# Altium PCB PCB1.PcbDoc
Units mm, origin at the board's own origin, x right, y up, seen from the top; angles counter-clockwise.
Board outline 51.5 x 50 mm, 4 copper layers (Top Layer, L2 (GND), L3 GND), L4 Signal), stack 1.97 mm thick; 35 components, 29 nets, 164 pads, 70 vias.
Unrouted connection lines stored in the file: 10.
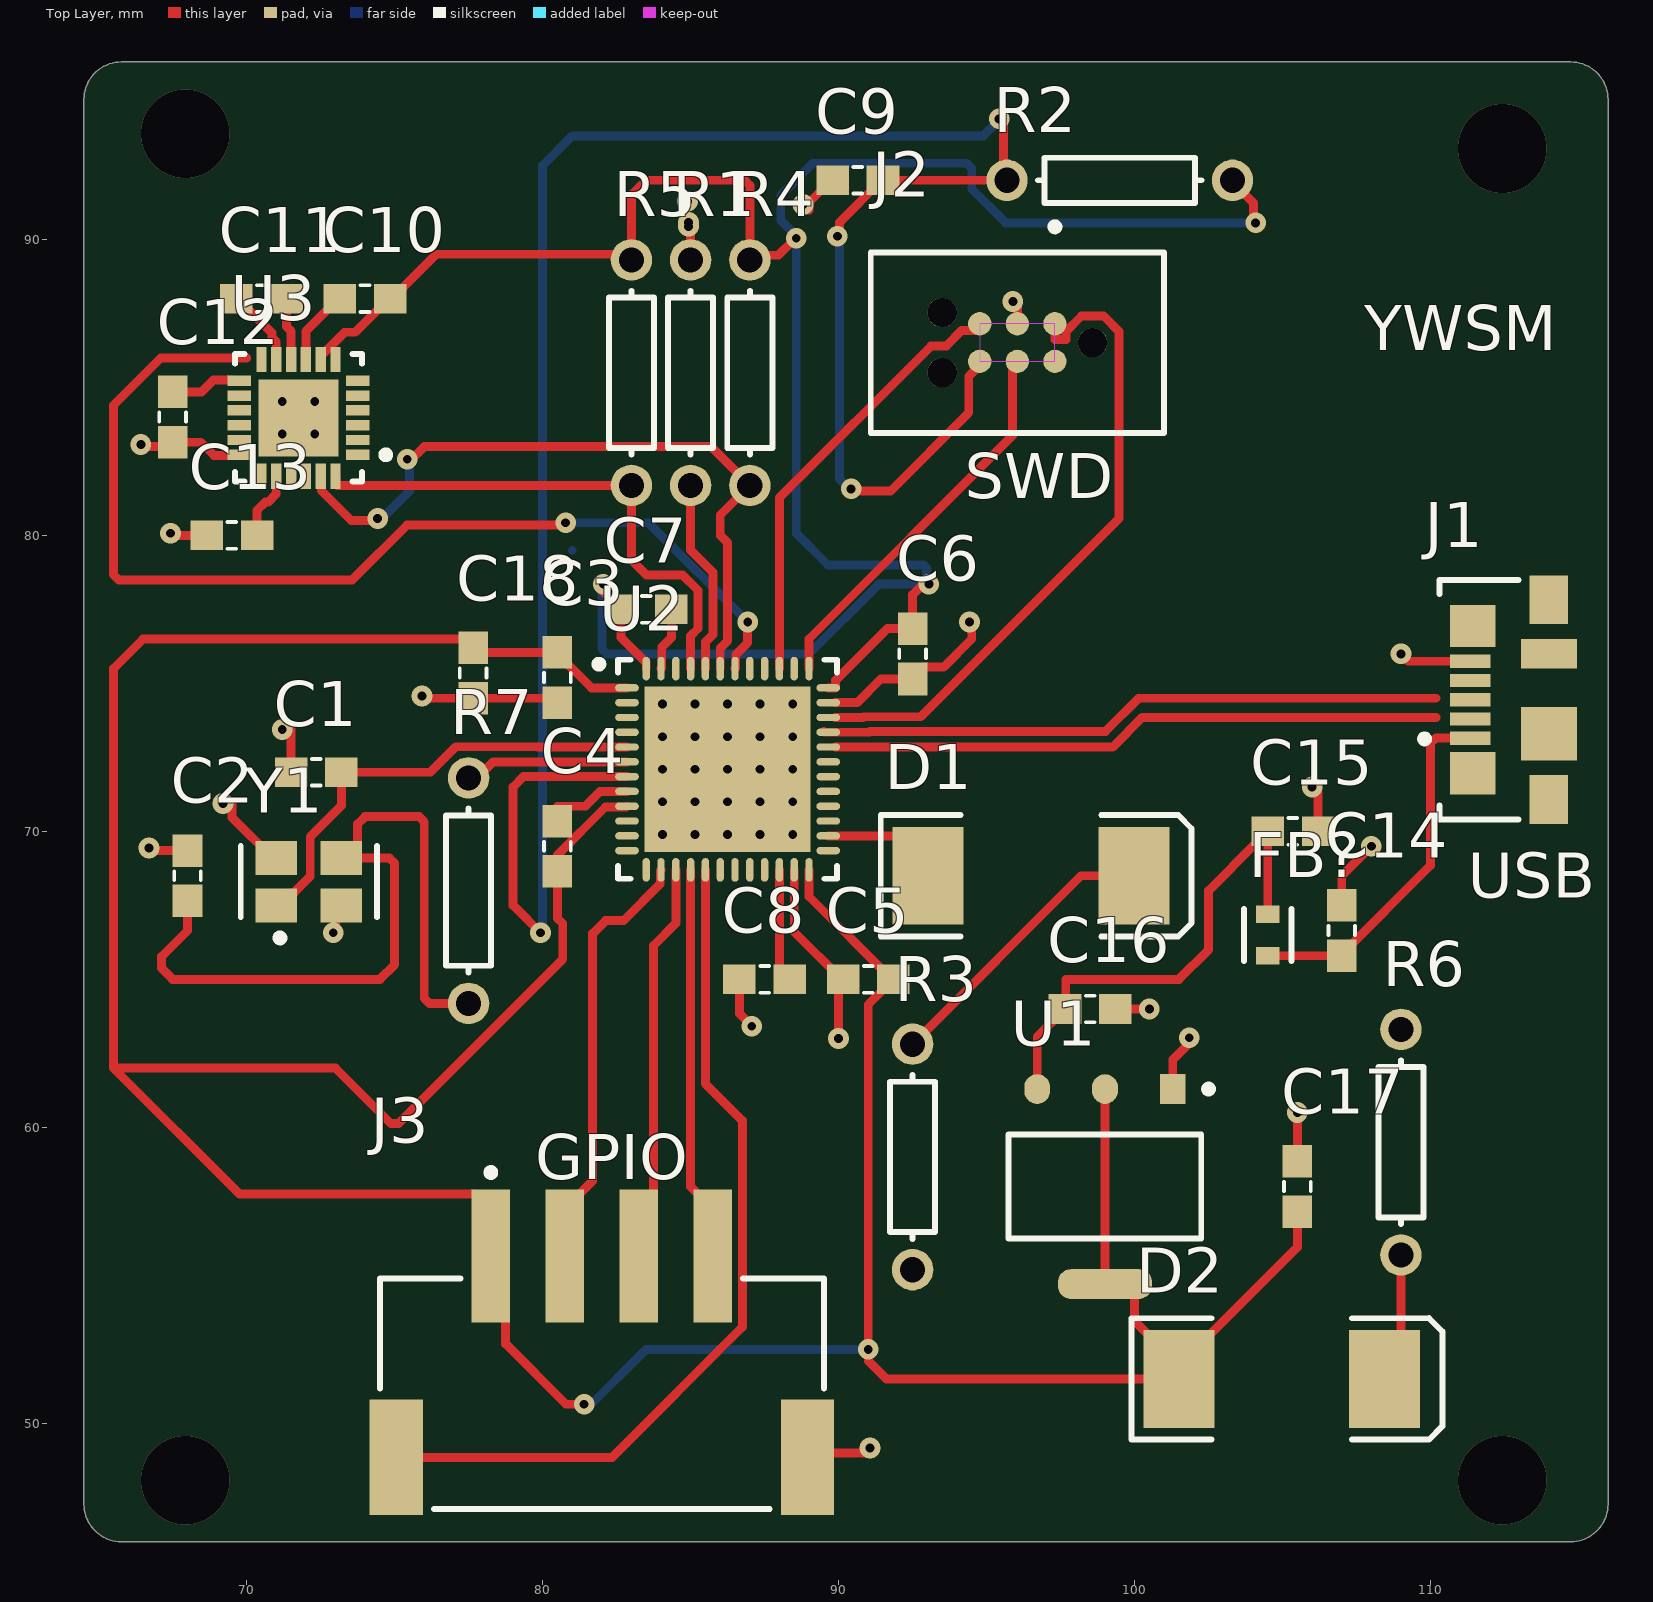
[diagram p0: Top Layer view]
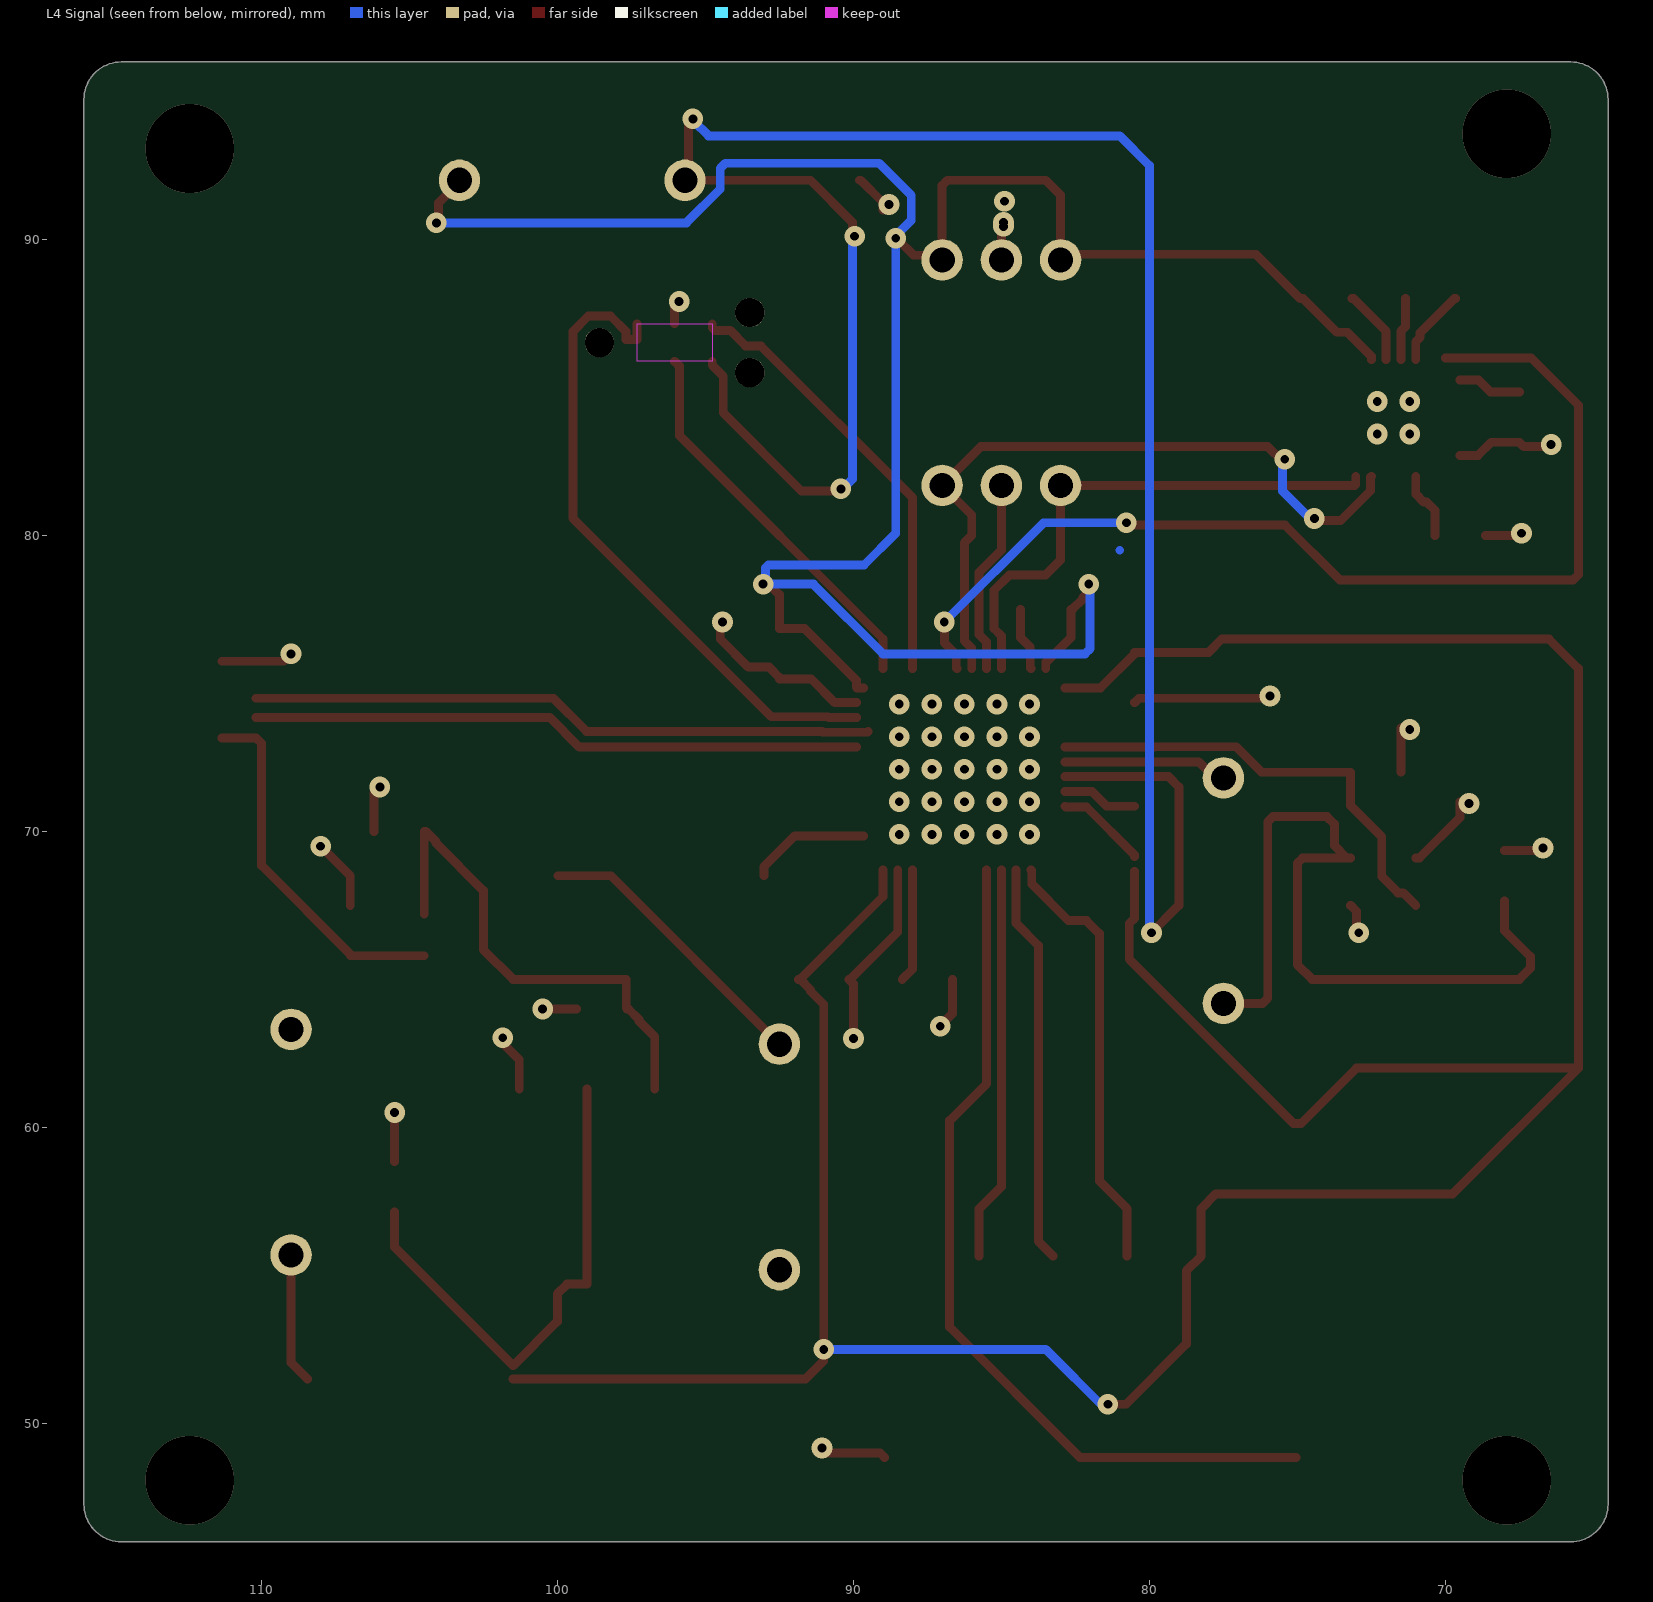
[diagram p1: L4 Signal view, seen from below]
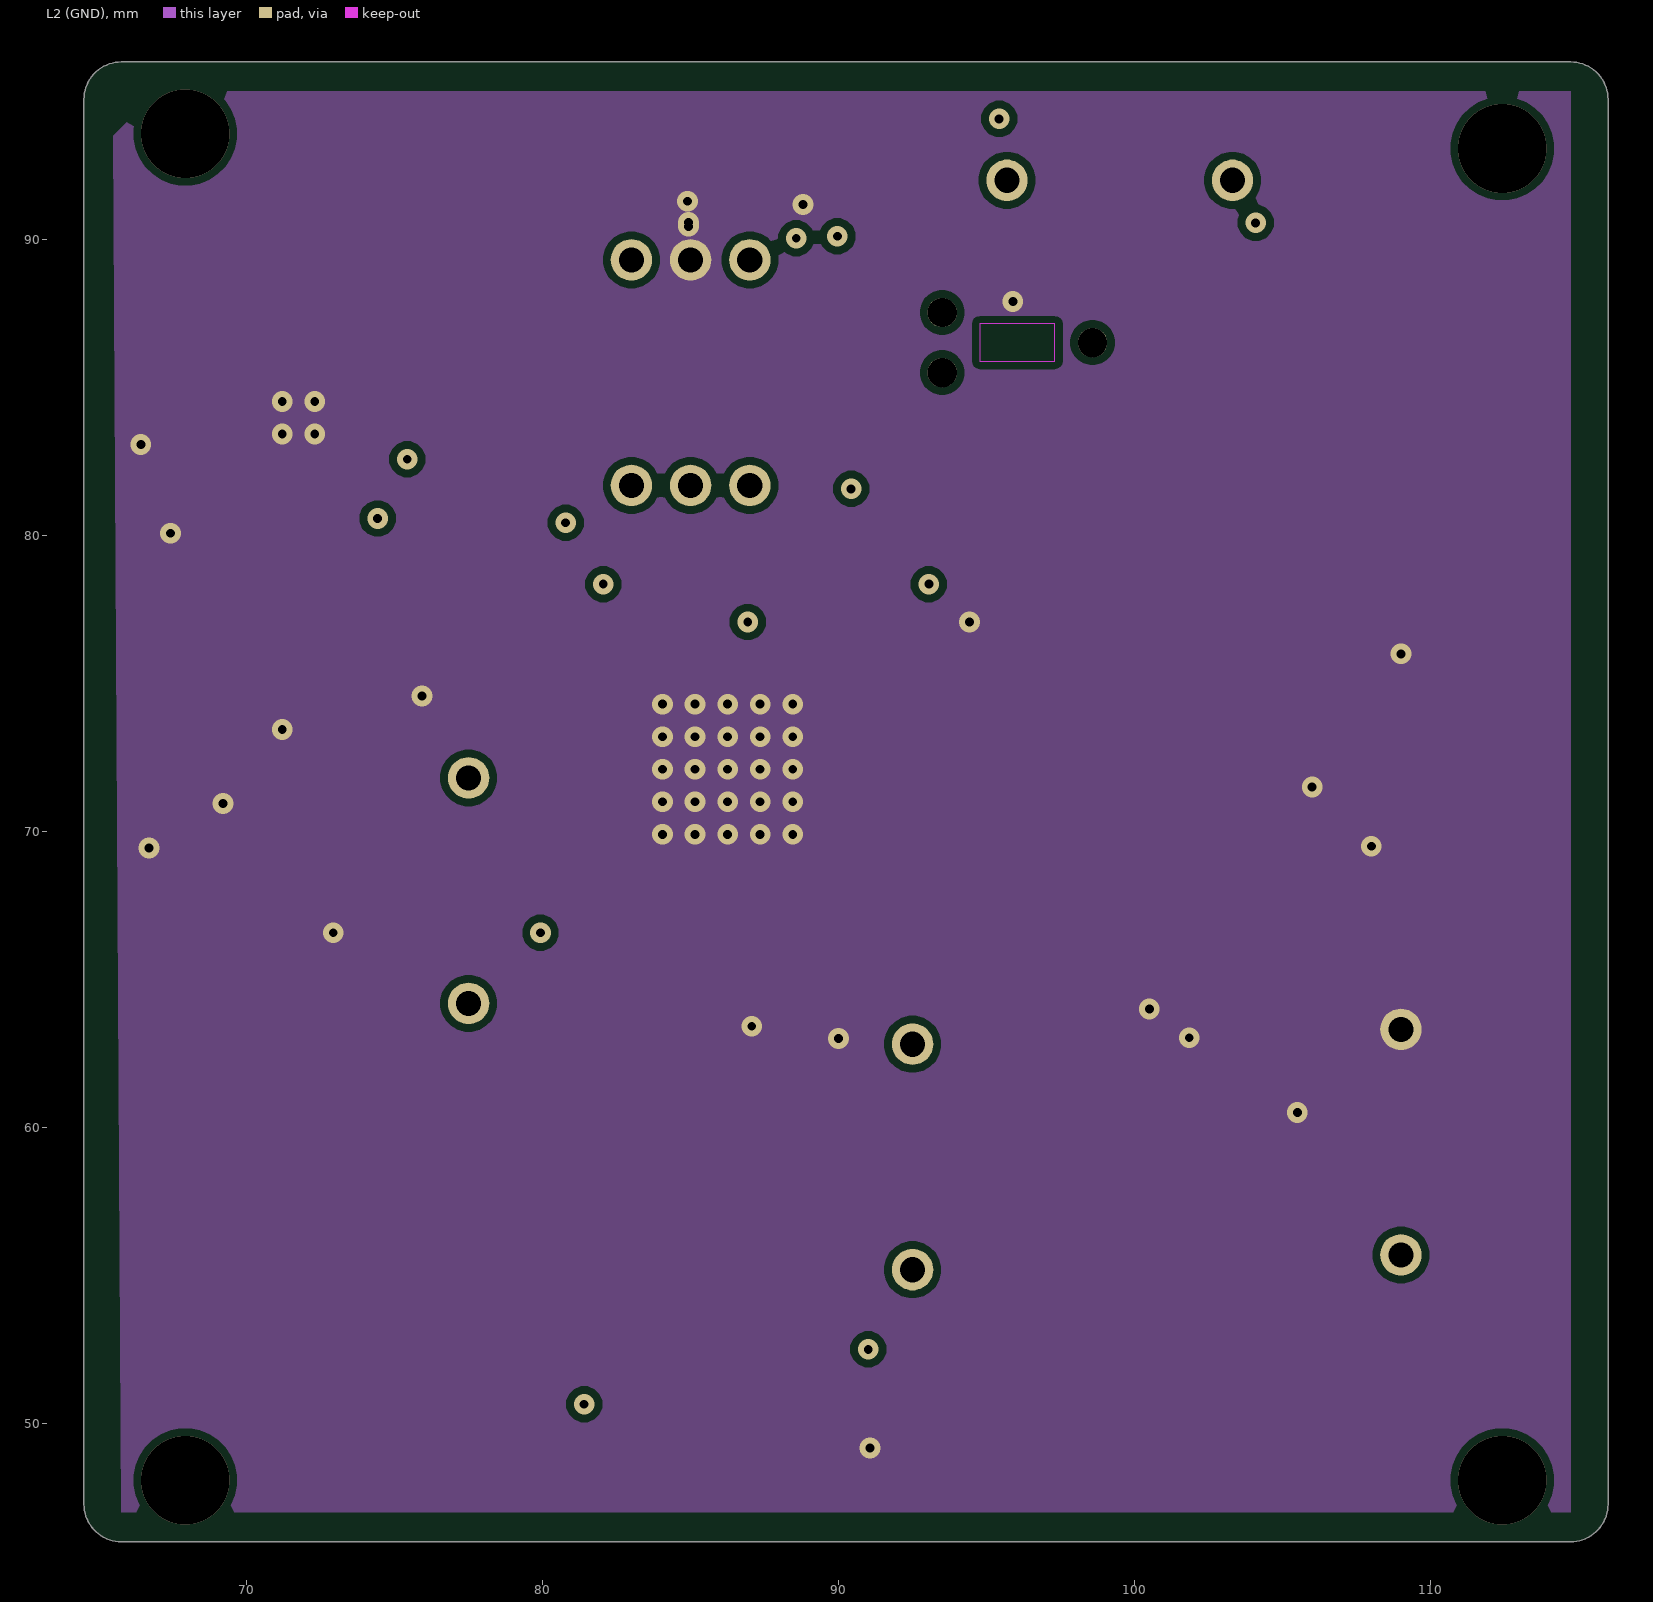
[diagram p2: L2 (GND)]
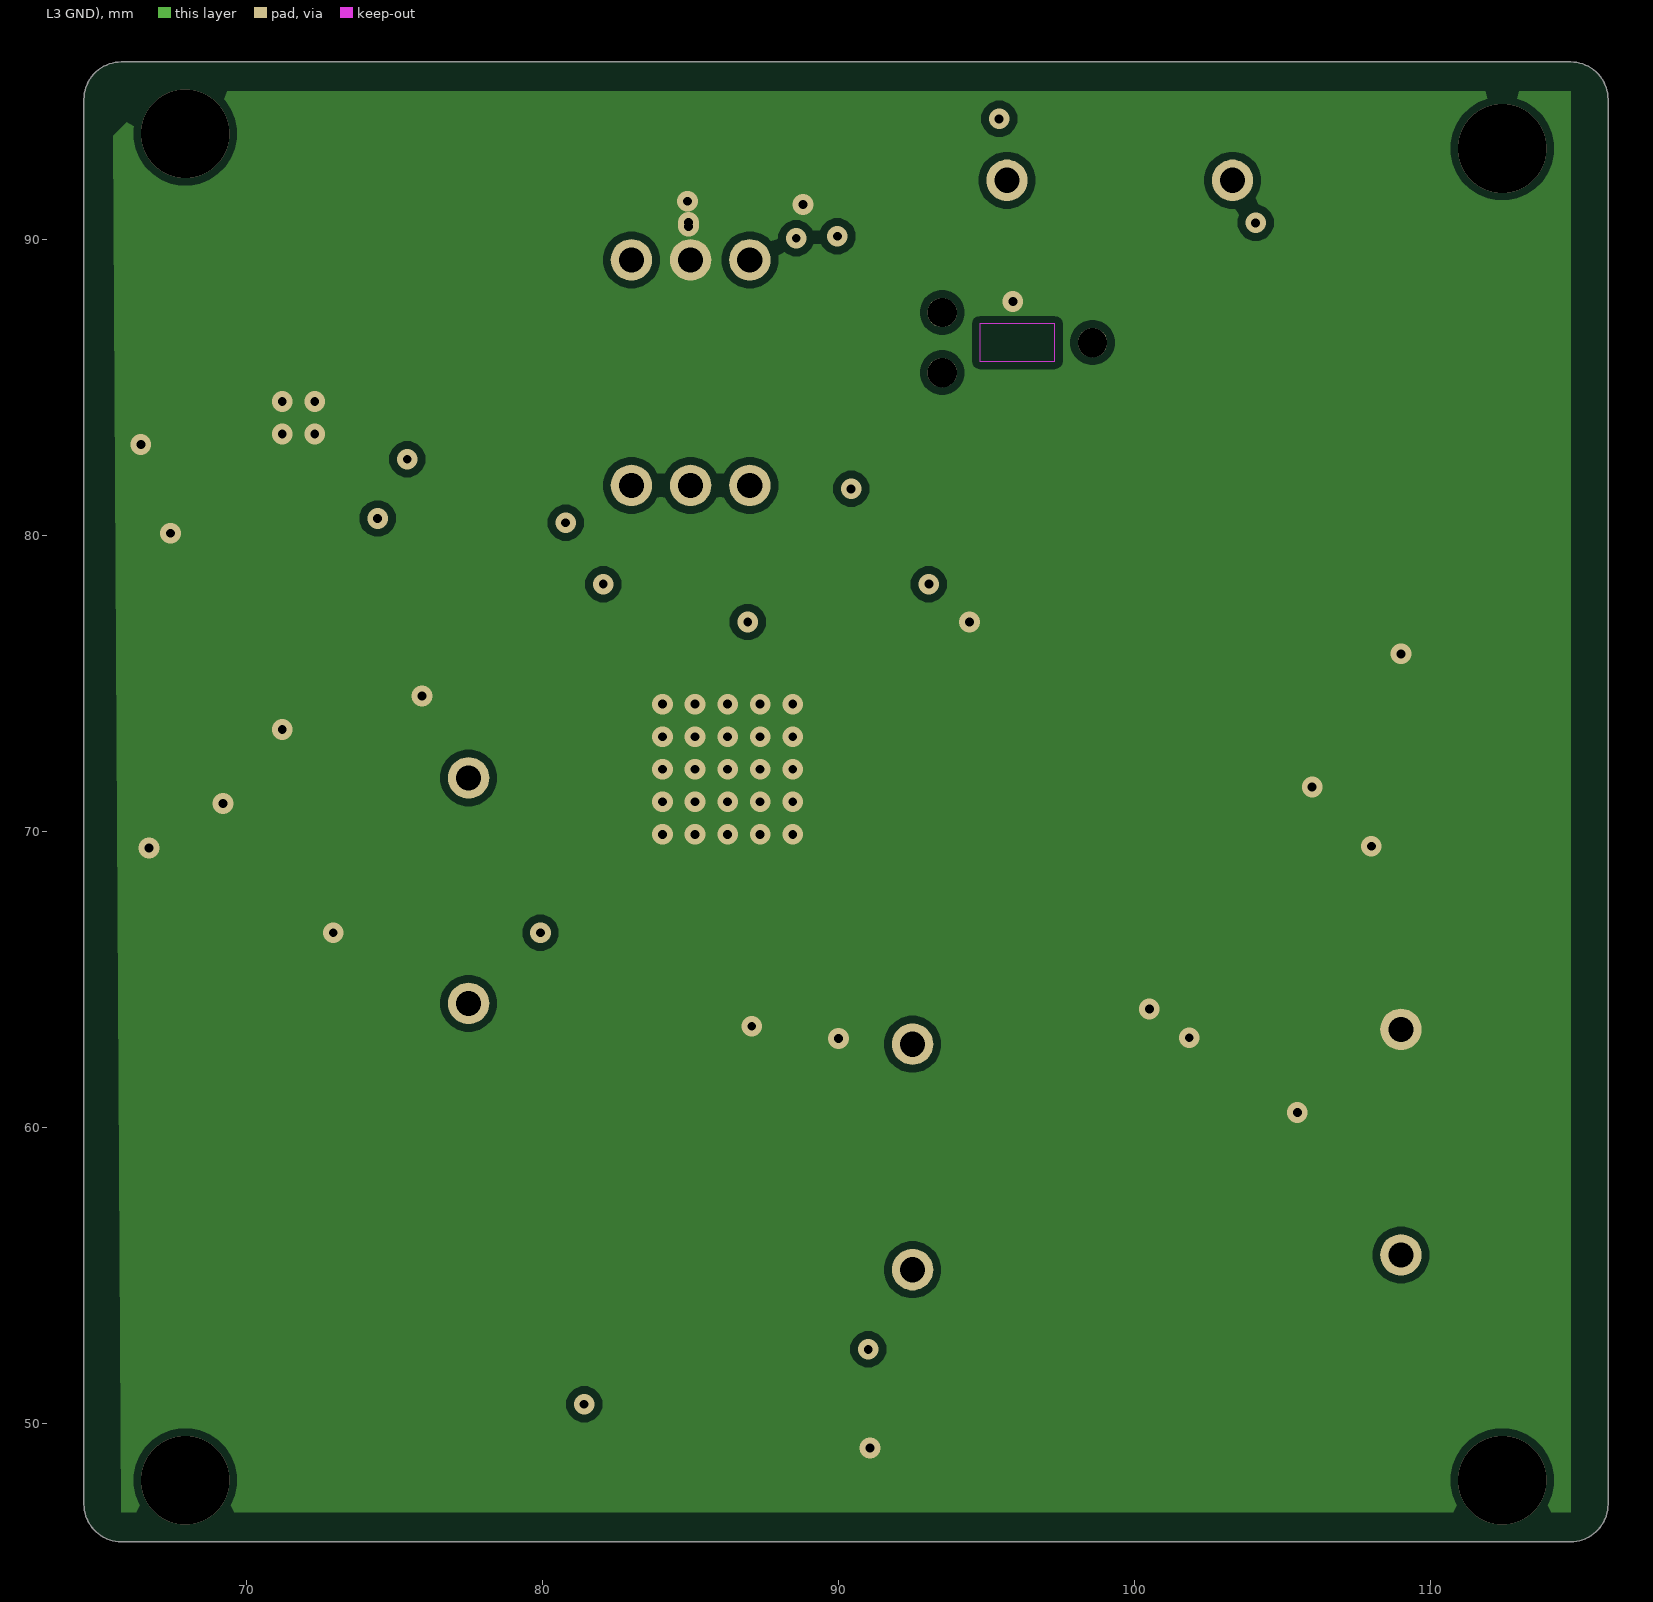
[diagram p3: L3 GND)]
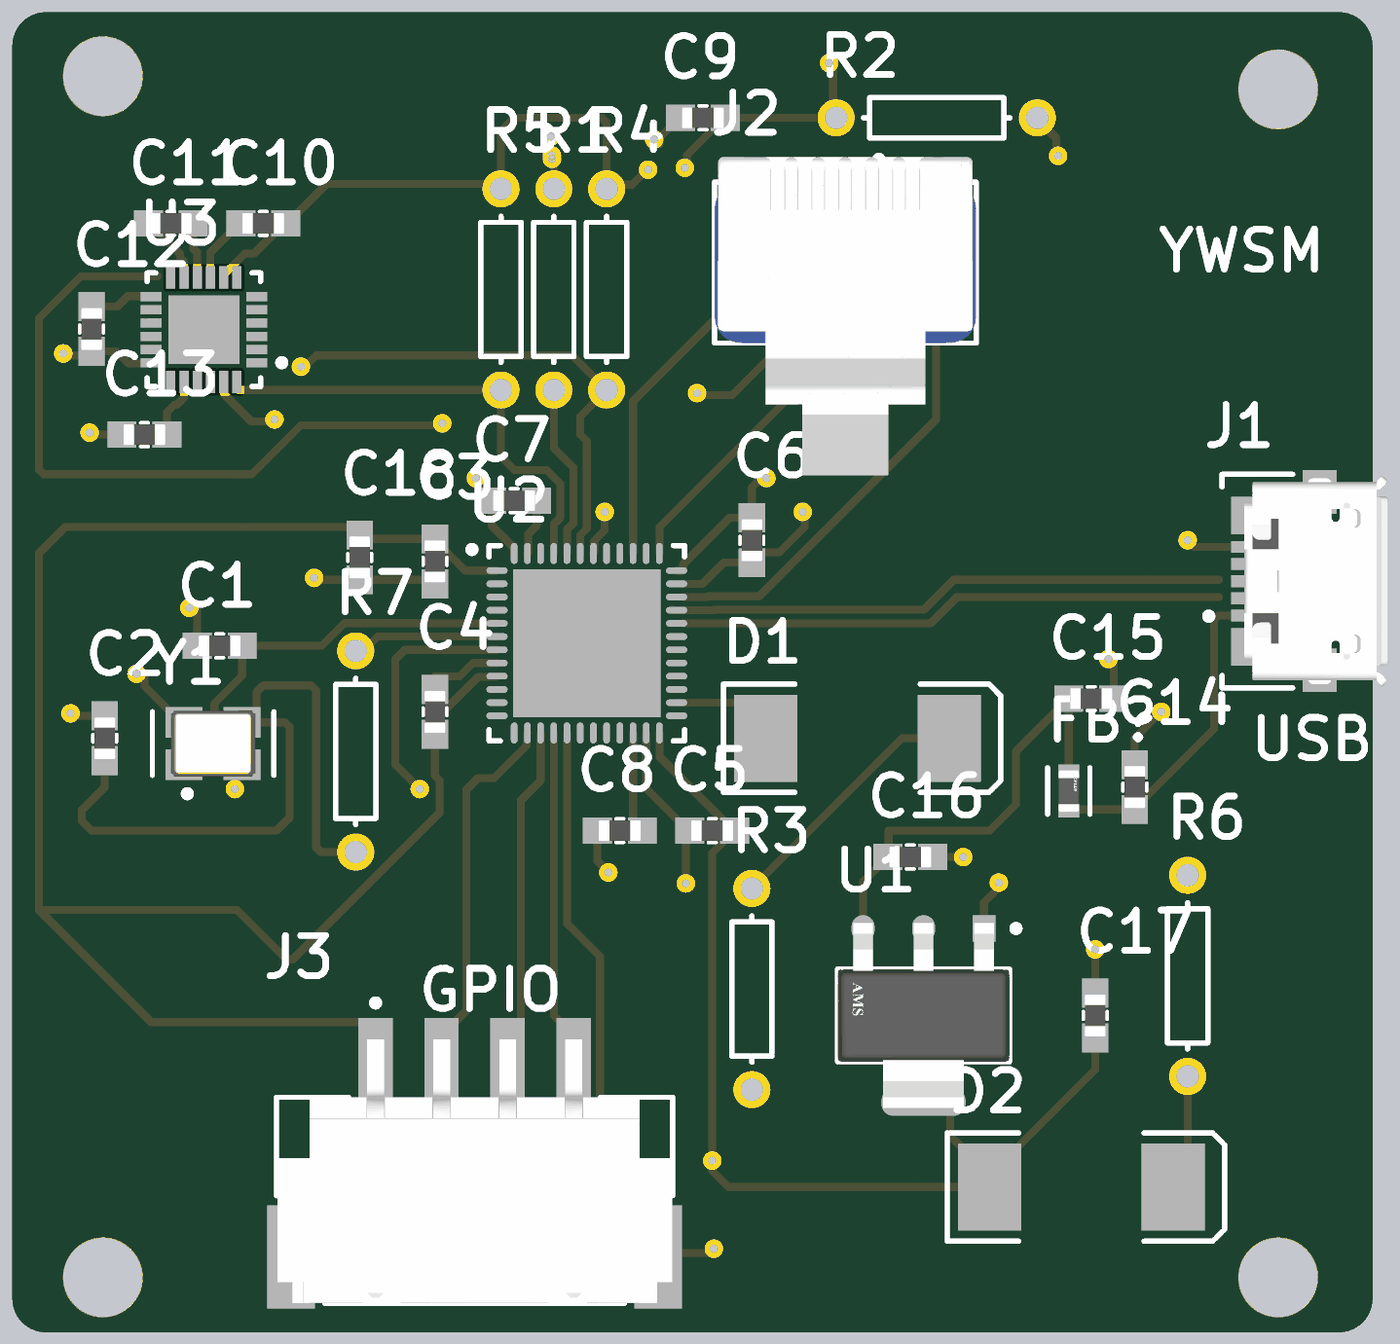
[diagram p4: 3D render of the assembled board from above, using the file's embedded part models]

## Layer stack, top to bottom
Top Solder: solder mask 0.0254, SM-001, Dk 4
Top Layer: signal copper 0.035
Dielectric 1: prepreg 0.2, PP-017, Dk 4.6
Dielectric 2: prepreg 0.2, PP-017, Dk 4.6
L2 (GND): signal copper 0.0175
Dielectric 3: core 1.065, Core-039, Dk 4.6
L3 GND): signal copper 0.0175
Dielectric 4: prepreg 0.2, PP-017, Dk 4.6
Dielectric 5: prepreg 0.2, PP-017, Dk 4.6
L4 Signal: signal copper 0.035
Bottom Solder: solder mask 0.0254, SM-001, Dk 4

## Board outline
64.5,47.27 ccw(c65.77,47.27) 65.77,46 114.73,46 ccw(c114.73,47.27) 116,47.27 116,94.73 ccw(c114.73,94.73) 114.73,96 65.77,96 ccw(c65.77,94.73) 64.5,94.73

## Design rules (kind name [scope] priority, off if disabled: settings)
Clearance [All] p1: gap=0.254 ignorepadtopadclearanceinfootprint=FALSE except(0.2: Arc-Arc Arc-Track Arc-SMDPad Arc-THPad Track-Track Track-SMDPad Track-THPad)
DiffPairsRouting [All] p1: maxlimit=0.203 minlimit=0.127 mostfreqgap=0.203 toplayer_mingap=0.203 toplayer_minwidth=0.416 toplayer_maxwidth=0.416 toplayer_prefwidth=0.416 midlayer1_maxgap=0.127 midlayer1_prefgap=0.127 midlayer1_minwidth=0.172 midlayer1_maxwidth=0.172 midlayer1_prefwidth=0.172 midlayer2_maxgap=0.127 midlayer2_prefgap=0.127 midlayer2_minwidth=0.172 midlayer2_maxwidth=0.172 midlayer2_prefwidth=0.172 bottomlayer_mingap=0.203 bottomlayer_minwidth=0.416 bottomlayer_maxwidth=0.416 bottomlayer_prefwidth=0.416 impedanceprofiledriven=TRUE impedanceprofileid={C4286DEB-E321-4A9C-8A9B-8DC85CD1D323} impedanceprofilevalue=90.000000 maxuncoupledlength=12.7
PolygonConnect [All] p1: connectstyle=Direct reliefconductorwidth=0.254 reliefentries=4 polygonreliefangle="90 Angle" airgapwidth=0.254
RoutingVias [All] p1: holewidth=0.3 width=0.9 viastyle="Through Hole" minholewidth=0.25 minwidth=0.55 maxholewidth=0.4 maxwidth=0.7
ShortCircuit [All] p1 off: allowed=FALSE
SolderMaskExpansion [All] p1: expansion=0 istentingtop=FALSE
SupplyNets "Schematic Supply Nets_5" [InNet('VCC')] p1: voltage=0.000
SupplyNets "Schematic Supply Nets_4" [InNet('VBUS')] p2: voltage=0.000
SupplyNets "Schematic Supply Nets_3" [InNet('+3V3')] p3: voltage=0.000
SupplyNets "Schematic Supply Nets_2" [InNet('NetR3_1')] p4: voltage=0.000
SupplyNets "Schematic Supply Nets_1" [InNet('GND')] p5: voltage=0.000
SupplyNets "Schematic Supply Nets" [InNet('+5')] p6: voltage=0.000
Width [All] p1: maxlimit=1 minlimit=0.2 preferedwidth=0.3 midlayer1_minwidth=0.254 midlayer1_maxwidth=0.254 midlayer1_prefwidth=0.254 midlayer2_minwidth=0.254 midlayer2_maxwidth=0.254 midlayer2_prefwidth=0.254 minimp=50.000000 maximp=50.000000 favimp=50.000000
28 further rules are at their usual default settings.

## Components (designator, comment, footprint, x,y, rotation, side; value= is the part's Value field where it differs from the comment)
C1 "CC0603KRX7R6BB104" CAPC1608X90 72.35,72 r180 top
C2 "CC0603KRX7R6BB104" CAPC1608X90 68,68.5 r90 top
C3 "CC0603KRX7R6BB104" CAPC1608X90 80.5,75.2 r270 top
C4 "CC0603KRX7R6BB104" CAPC1608X90 80.5,69.5 r90 top
C5 "CC0603KRX7R6BB104" CAPC1608X90 91,65 r180 top
C6 "CC0603KRX7R6BB104" CAPC1608X90 92.5,76 r270 top
C7 "CC0603KRX7R6BB104" CAPC1608X90 83.5,77.5 r0 top
C8 "CC0603KRX7R6BB104" CAPC1608X90 87.5,65 r180 top
C9 "CC0603KRX7R6BB104" CAPC1608X90 90.65,92 r180 top
C10 "CC0603KRX7R6BB104" CAPC1608X90 74,88 r180 top
C11 "CC0603KRX7R6BB104" CAPC1608X90 70.5,88 r180 top
C12 "CC0603KRX7R6BB104" CAPC1608X90 67.5,84 r270 top
C13 "CC0603KRX7R6BB104" CAPC1608X90 69.5,80 r180 top
C14 "CC0603KRX7R6BB104" CAPC1608X90 107,66.65 r90 top
C15 "CC0603KRX7R6BB104" CAPC1608X90 105.35,70 r0 top
C16 "CC0603KRX7R6BB104" CAPC1608X90 98.5,64 r0 top
C17 "CC0603KRX7R6BB104" CAPC1608X90 105.5,58 r90 top
C18 "CC0603KRX7R6BB104" CAPC1608X90 77.65,75.35 r270 top
D1 "Diode" SMC 96.5,68.5 r0 top
D2 "Diode" SMC 104.975,51.5 r0 top
FB? "MPZ1608S221ATA00 | 120R" FP-MPZ1608-0_8-MFG 104.5,66.5 r90 top
J1 "473460001" FP-473460001-MFG 113.65,74.45 r90 top
J2 "TC2030-MCP-NL" FP-TC2030-MCP-NL-MFG 96.04,86.516 r180 top
J3 "(Q)S4B-XH-SM4-TB (LF)(SN)" FP-Q_S4B-XH-SM4-TB_LF-MFG 82,51 r0 top
R1 "Res1" AXIAL-0.3 85,85.5 r270 top value=1K
R2 "Res1" AXIAL-0.3 99.5,92 r0 top value=10k
R3 "Res1" AXIAL-0.3 92.5,59 r90 top value=1K
R4 "Res1" AXIAL-0.3 87,85.5 r90 top value=1K
R5 "Res1" AXIAL-0.3 83,85.5 r90 top value=1K
R6 "Res1" AXIAL-0.3 109,59.5 r270 top value=1K
R7 "Res1" AXIAL-0.3 77.5,68 r270 top value=0R
U1 "AMS1117-3.3" FP-ams1117-IPC_C 99,58 r270 top
U2 "STM32F411CEU6" STM-UFQFPN48_L 86.25,72.1 r0 top
U3 "MPU-6050" IS-QFN-24_V 71.75,83.975 r180 top
Y1 "24MHz" FP-TSX-3225-MFG 72.1,68.3 r0 top

## Footprints (in the part's own frame and the unit in brackets; to place one, negate y for a bottom-side part, rotate by r counter-clockwise, add the part's x,y. Pads: shape width x height; smd on the part's side, far side on the other; paste and mask are expansions set on the pad)
AXIAL-0.3 [mm] "Axial Device, Thru-Hole; 2 Leads; 0.3 in Pin Spacing"
  round 1.4 hole 0.85: 1(-3.81,0) 2(3.81,0)
  silkscreen extent -2.77,-0.76 2.77,0.76
CAPC1608X90 [mm]
  rect 1.1x1 smd: 1(-0.85,0) 2(0.85,0)
  silkscreen extent -0.15,-0.45 0.15,0.45, body extent -0.8,-0.4 0.8,0.4, height 0.9
FP-473460001-MFG [mm]
  rect 0.45x1.38 smd paste+0 mask+0: 1(-1.3,2.31) 2(-0.65,2.31) 3(0,2.31) 4(0.65,2.31) 5(1.3,2.31)
  rect 1.425x1.55 smd paste+0 mask+0: 6(-2.488,2.225) 7(2.488,2.225)
  rect 1.65x1.3 smd paste+0 mask+0: 8(-3.375,-0.35) 11(3.375,-0.35)
  rect 1.8x1.9 smd paste+0 mask+0: 9(-1.15,-0.35)
  rect 1x1.9 smd paste+0 mask+0: 10(1.55,-0.35)
  silkscreen extent -4.05,0.67 4.05,3.97, body extent -4.3,-2.48 4.3,3.45, height 0.25
FP-ams1117-IPC_C [mm]
  rect 1.004x0.872 smd paste+0 mask+0: 1(-3.295,2.29)
  rrect100% 1.004x0.872 smd paste+0 mask+0: 2(-3.295,0) 3(-3.295,-2.29)
  rrect87% 1.004x3.182 smd paste+0 mask+0: 4(3.295,0)
  silkscreen extent -3.42,-3.25 1.75,3.63, body extent -3.9,-3.35 3.9,3.35, height 0.25
FP-MPZ1608-0_8-MFG [mm]
  rect 0.6x0.8 smd paste+0 mask+0: 1(-0.7,0) 2(0.7,0)
  silkscreen extent -0.87,-0.8 0.87,0.8, body extent -1.1,-0.58 1.1,0.58, height 0.25
FP-Q_S4B-XH-SM4-TB_LF-MFG [mm]
  rect 1.3x4.5 smd paste+0 mask+0: 1(-3.75,4.65) 2(-1.25,4.65) 3(1.25,4.65) 4(3.75,4.65)
  rect 1.8x3.9 smd paste+0 mask+0: 5(-6.95,-2.15) 6(6.95,-2.15)
  silkscreen extent -7.5,-3.9 7.5,7.6, body extent -7.95,-4.2 7.95,7, height 0.25
FP-TC2030-MCP-NL-MFG [mil]
  round 30.98 smd paste-39370.1 mask+0: 1(-50,-25) 2(-50,25) 3(0,-25) 4(0,25) 5(50,-25) 6(50,25)
  round 39.02 hole 39.02 unplated paste-99999 mask+0: ""(-100,0) ""(100,-40) ""(100,40)
  Keep-Out Layer region: -50.01,-25 49.99,-25 49.99,25 -50.01,25
  silkscreen extent -195,-159 195,120, body extent -199,-124 199,124, height 10
FP-TSX-3225-MFG [mm]
  rect 1.4x1.15 smd paste+0 mask+0: 1(-1.1,-0.8) 2(1.1,-0.8) 3(1.1,0.8) 4(-1.1,0.8)
  silkscreen extent -2.3,-2.02 2.3,1.2, body extent -1.9,-1.48 1.9,1.48, height 0.25
IS-QFN-24_V [mm] "QFN, 24-Leads, Body 4x4mm, Pitch 0.5mm, Thermal Pad 2.7x2.6mm"
  rect 0.8x0.35 smd: 1(-2,1.25) 2(-2,0.75) 3(-2,0.25) 4(-2,-0.25) 5(-2,-0.75) 6(-2,-1.25) 13(2,-1.25) 14(2,-0.75) 15(2,-0.25) 16(2,0.25) 17(2,0.75) 18(2,1.25)
  rect 0.35x0.85 smd mask+0.102: 7(-1.25,-1.975) 8(-0.75,-1.975) 9(-0.25,-1.975) 10(0.25,-1.975) 11(0.75,-1.975) 12(1.25,-1.975) 19(1.25,1.975) 20(0.75,1.975) 21(0.25,1.975) 22(-0.25,1.975) 23(-0.75,1.975) 24(-1.25,1.975)
  rect 2.7x2.6 smd: 25(0,0)
  silkscreen extent -3.08,-2.15 2.15,2.15, body extent -2,-2 2,2, height 0.95
SMC [mm] "DO-214-AB/SMC; 2 C-Bend Leads; Body 7.9 x 5.9 mm, inc. leads (LxW)"
  rect 2.4x3.3 smd: 1(-3.475,0) 2(3.475,0)
  silkscreen extent -5.07,-2.05 5.43,2.05
STM-UFQFPN48_L [mm] "QFN, 48-Leads, Body 7.1x7.1mm, Pitch 0.5mm, Thermal Pad 5.6x5.6mm, IPC High Density"
  oval 0.8x0.25 smd: 1(-3.4,2.75) 2(-3.4,2.25) 3(-3.4,1.75) 4(-3.4,1.25) 5(-3.4,0.75) 6(-3.4,0.25) 7(-3.4,-0.25) 8(-3.4,-0.75) 9(-3.4,-1.25) 10(-3.4,-1.75) 11(-3.4,-2.25) 12(-3.4,-2.75) 25(3.4,-2.75) 26(3.4,-2.25) 27(3.4,-1.75) 28(3.4,-1.25) 29(3.4,-0.75) 30(3.4,-0.25) 31(3.4,0.25) 32(3.4,0.75) 33(3.4,1.25) 34(3.4,1.75) 35(3.4,2.25) 36(3.4,2.75)
  oval 0.25x0.8 smd: 13(-2.75,-3.4) 14(-2.25,-3.4) 15(-1.75,-3.4) 16(-1.25,-3.4) 17(-0.75,-3.4) 18(-0.25,-3.4) 19(0.25,-3.4) 20(0.75,-3.4) 21(1.25,-3.4) 22(1.75,-3.4) 23(2.25,-3.4) 24(2.75,-3.4) 37(2.75,3.4) 38(2.25,3.4) 39(1.75,3.4) 40(1.25,3.4) 41(0.75,3.4) 42(0.25,3.4) 43(-0.25,3.4) 44(-0.75,3.4) 45(-1.25,3.4) 46(-1.75,3.4) 47(-2.25,3.4) 48(-2.75,3.4)
  rect 5.6x5.6 smd: 49(0,0)
  silkscreen extent -4.47,-3.7 3.7,3.7, body extent -3.55,-3.55 3.55,3.55, height 0.6

## Part data
C1 C2 C3 C4 C5 C6 C7 C8 C9 C10 C11 C12 C13 C14 C15 C16 C17 C18: "0.1 ÂµF Â±10% 10V Ceramic Capacitor X7R 0603 (1608 Metric)", Package="0603 Yageo", Check_prices=https://www.snapeda.com/parts/CC0603KRX7R6BB104/Yageo/view-part/?ref=eda, MF=Yageo, MP=CC0603KRX7R6BB104, SnapEDA_Link=https://www.snapeda.com/parts/CC0603KRX7R6BB104/Yageo/view-part/?ref=snap
D1 D2: "Default Diode", Code_JEDEC=DO-214-AB, LatestRevisionDate=17-Jul-2002, LatestRevisionNote="Re-released for DXP Platform.", PackageDescription="DO-214-AB/SMC; 2 C-Bend Leads; Body 7.9 x 5.9 mm, inc. leads (LxW)", PackageReference=SMC, PackageVersion=Sep-1996, Published=8-Jun-2000, Publisher="Altium Limited"
FB?: library part CMP-08257-000028-1, "Power line Ferrite Bead 220Ω @ 100MHz 2.2A DCR 0.05Ω SMD 0603", Case Code (Imperial)=0603, Case Code (Metric)=1608, Current Rating=2.2A, DC Resistance (DCR)=50mR, Package Quantity=1, Tolerance=25%, Case/Package=0603, Core Material=Ferrite, Height=0.037inch, Impedance=220R, Lead Free="Lead Free", Length=0.063inch, Max DC Current=2.2A, Mount="Surface Mount", Number of Pins=2, Packaging="Cut Tape", REACH SVHC="No SVHC", RoHS Compliant=Yes, Series=MPZ, Width=0.031inch
J1: library part CMP-2000-05246-2, "CONN RCPT USB2.0 MICRO B SMD R/A", Current Rating=1.8A, Manufacturer=Molex, Package=0, Temperature="-30°C to +85°C", Temperature Range High=+85°C, Temperature Range Low=-30°C, Voltage Rating=30V, Automotive=No, Category=Conn, ComponentLink2Description=Datasheet, ComponentLink2URL=https://www.molex.com/webdocs/datasheets/pdf/en-us/0473460001_IO_CONNECTORS.pdf, Conn Orientation="Right Angle", Contact Material=Gold,Nickel, Device Class L1=Connectors, Device Class L2="USB Connectors", Device Class L3=unset, Digikey Description="CONN RCPT USB2.0 MICRO B SMD R/A", Footprint Url=https://www.molex.com/pdm_docs/sd/473460001_sd.pdf, Height=2.945mm, Is Female=yes, Lead Free=Yes, Manufacturer Part Number=473460001, Number Of Contacts=5, Octopart=https://octopart.com/47346-0001-molex-7164928, Pitch=0.65mm, RoHS=TRUE, Shielding=true, Usb Standard="USB 2.0"
J2: library part CMP-205963-000002-1, "CABLE TAG-CONNECT IN-CIRCUIT", Package Quantity=1, Lead Free="Lead Free", Reach SVHC Compliant=Yes, RoHS Compliant=Yes, Series=-
J3: library part CMP-17439-000477-1, "CONN HEADER SMD R/A 4POS 2.5MM"
R1 R2 R3 R4 R5 R6 R7: "Resistor", LatestRevisionDate=17-Jul-2002, LatestRevisionNote="Re-released for DXP Platform.", PackageDescription="Axial Device, Thru-Hole; 2 Leads; 0.3 in Pin Spacing", PackageReference=AXIAL-0.3, Published=8-Jun-2000, Publisher="Altium Limited"
U1: library part CMP-209535-000002-1, "1A LOW DROPOUT VOLTAGE REGULATOR", RoHS Compliant=Yes
U2: library part CMP-0243-00165-1, "ARM Cortex-M4 32-bit MCU+FPU, 512 KB Flash, 128 KB RAM, 36 I/Os, 48-Pin UFQFPN, -40 to 85 degC, Tray", I/Os (High Current)=36, Operating Frequency(F) (Processor speed) (MHz)=100, Package Description=UFQFPN48, Package Reference="48-Pin Ultra Thin Fine Pitch Quad Flat No-Lead, 7 x 7 x 0.6 mm Body, 0.5 mm Pitch, Exposed Pad", Supply Voltage(Vcc) min (V)=1.7, ComponentLink1Description="Manufacturer URL", ComponentLink1URL=http://www.st.com/, ComponentLink2Description=Datasheet, ComponentLink2URL=http://www.st.com/st-web-ui/static/active/en/resource/technical/document/datasheet/DM00115249.pdf, Core="ARM Cortex-M4", DatasheetVersion="Rev. 6", FLASH Size (Prog) (kB)=512, Internal RAM Size (kB)=128, Mounting Technology="Surface Mount", Packing=Tray
U3: library part CMP-1753-00002-2, "3-Axis Gyroscope, Accelerometer and a Digital Motion Processor(TM) (DMP), 2.375 to 3.46 V, -40 to 85 degC, 24-Pin QFN, RoHS, Tape and Reel", Manufacturer=InvenSense, Standard Package=5,000, Category=Sensors,Transducers, Datasheet URL=http://datasheet.octopart.com/MPU-6050-InvenSense-datasheet-14421344.pdf, Datasheet Version="Rev. 3.3, 05/2012", Dynamic Catalog=MPU-6000™Series, Family=Multifunction, Featured Product=MPU-60506-Axis,IntegratedI²CSolution, Manufacturer URL=http://www.invensense.com/, Online Catalog=MPU-6000™Series, Other Names="1428-1007-2 / MPU6050", Output Type=Digital, Sensor Type=MotionTracking, Unit PriceUSD=Digital
Y1: library part CMP-36405-000018-1, "CRYSTAL 24.0000MHZ 9PF SMD", Case/Package=SMD/SMT, ESR (Equivalent Series Resistance)=40R, Frequency Stability=20ppm, Frequency Tolerance=10ppm, Load Capacitance=9pF, Max Operating Temperature=105°C, Min Operating Temperature=-40°C, Package Quantity=250, Depth=2.5mm, Drive Level=200uW, Frequency=24MHz, Height=0.024inch, Lead Free="Lead Free", Length=3.2mm, Mount="Surface Mount", Number of Pins=4, Packaging="Tape and Reel", RoHS Compliant=Yes, Series=TSX-3225, Termination=SMD/SMT, Tolerance=10ppm, Weight=0.000564oz, Width=2.5mm

## Via types
v1: diameter 0.7, hole 0.3, Top Layer to L4 Signal, 66 vias
v2: diameter 3, hole 3, Top Layer to L4 Signal, 4 vias

## Nets (pads, with @x,y where several pads share a name; then routed paths per layer and width w, separated by ;. In a path a pad name is that pad's centre, name@x,y a point inside that pad or via, vN(x,y) a via of type N, cw(c..) or ccw(c..) an arc to the next point about the centre after c; other vN are vias at no path point)
+3V3: C3.1 C4.1 C5.1 C6.1 C7.1 C10.1 C12.1 C17.1 C18.1 D2.1 J3.1 R2.2 R4.2 R5.2 U1.2 U1.4 U2.1 U2.9 U2.24 U2.36 U2.48 U3.8 U3.13 | length 221.5
  Top Layer w0.3: C12.1 68.475,84.85 68.875,85.25 U3.13@69.5,85.25 ; U3.8 72.5,86.053 73.311,86.864 73.664,86.864 74.8,88 C10.1 74.9,88 76.4,89.5 82.81,89.5 R5.2 83,91.5 83.5,92 86.824,92 87,91.824 R4.2 87.157,89.467 87.967,89.467 v1@88.5,90 ; C4.1 80.5,67.066 80.679,66.887 80.679,65.679 75.124,60.124 74.876,60.124 73,62 65.5,62 ; C4.1@80.5,69.15 80.5,69.2 82.125,70.825 82.825,70.825 U2.9 ; C3.1@80.5,76 81.65,74.85 U2.1 ; C3.1 78,76.05 77.55,76.5 66.5,76.5 65.5,75.5 65.5,62 ; v1(81.404,50.645) 80.788,50.645 78.75,52.684 78.75,55.15 J3.1 78.25,57.25 77.75,57.75 69.75,57.75 65.5,62 ; v1@82,78.5 82,78.15 82.25,77.9 82.25,77.85 82.6,77.5 C7.1 82.65,76.55 83.45,75.75 83.475,75.75 83.5,75.725 U2.48 ; U2.24 89,67.8 C5.1@91.8,65 ; U2.36 89.875,74.85 89.9,74.875 89.9,75.1 91.65,76.85 C6.1 92.5,78 v1@93,78.5 ; C5.1 C5.1@91.8,65 ; U1.2 U1.4 99.674,54.705 100.004,54.375 100.004,53.446 101.5,51.95 105.5,55.95 C17.1 ; D2.1 91.608,51.5 91,52.108 v1(91,52.5) 91,64.15 91.45,64.6 91.45,64.65 C5.1@91.8,65 ; R2.2 103.31,91.938 104.022,91.226 104.022,90.522 v1@104,90.5
  L4 Signal w0.3: v1@81.5,50.5 83.5,52.5 v1(91,52.5) ; v1(82.049,78.353) 82,78.304 82,76.176 82.176,76 89,76 91.353,78.353 v1(93.049,78.353) 92.972,78.429 92.972,78.901 92.873,79 89.642,79 88.571,80.071 v1(88.571,90.039) 88.571,90.12 88.045,90.645 88.045,91.494 89.127,92.576 94.324,92.576 94.5,92.4 94.5,91.705 95.644,90.561 v1(104.093,90.561)
+5: C15.1 C16.1 FB?.2 U1.3 | length 17
  Top Layer w0.3: U1.3 96.71,63.06 97.25,63.6 97.25,63.65 97.6,64 C16.1 97.676,64.026 97.676,65 101.5,65 102.5,66 102.5,68 104.1,69.6 104.1,69.65 104.45,70 C15.1 FB?.2
GND: C1.2 C2.2 C3.2 C4.2 C5.2 C6.2 C7.2 C8.2 C9.2 C10.2 C11.2 C12.2 C13.2 C14.2 C15.2 C16.2 C17.2 C18.2 J1.5 J2.3 J3.6 R1.1 R6.1 U1.1 U2.8 U2.23 U2.35 U2.47 U2.49 U3.1 U3.9 U3.11 U3.18 U3.25 Y1.2 Y1.4 | length 56.5
  Top Layer w0.3: v1@66.5,69.5 66.65,69.35 C2.2 ; v1@66.5,83 67.35,83 C12.2 68.45,83.15 68.9,82.7 U3.18@69.5,82.7 ; v1@67.5,80 C13.2 ; v1@69.5,71 69.5,70.475 70.875,69.1 Y1.4 ; C11.2 69.7,88 70.85,86.85 70.85,86.695 71,86.545 U3.11 ; C1.2 v1@71.5,73.5 ; U3.9 72,86.9 73.1,88 C10.2 ; v1@73,66.5 73,67.3 Y1.2 ; v1@76,74.5 C18.2 80.35,74.5 C3.2 ; C4.2@80.5,70.85 81.443,70.85 81.943,71.35 U2.8 ; U2.47 84.025,75.525 84.025,76.225 84.35,76.55 C7.2 ; R1.1 v1@85,90.5 ; C8.2 86.65,63.85 v1@87,63.5 ; U2.23 88.5,66.6 90.1,65 C5.2 90,64.85 v1(90,63) ; J3.6 89.1,49 v1@91,49 ; v1@89,91 89,91.25 89.75,92 C9.2 ; U2.35@89.9,74.35 90.625,74.35 91.425,75.15 C6.2 92.5,75.2 92.85,75.55 93.55,75.55 94.5,76.5 v1@94.5,77 ; v1@96,88 96.04,87.96 J2.3 ; C16.2 v1(100.5,64) ; U1.1 101.29,62.29 v1@102,63 ; C17.2 v1(105.5,60.5) ; v1(106,71.5) 106.2,71.3 C15.2 ; C14.2 107,68.5 v1(108,69.5) ; v1(109,76) 109.25,75.75 J1.5
  other v1: 91.062,49.164 101.85,63.03 87.064,63.417 72.925,66.575 66.701,69.443 84.05,69.9 85.15,69.9 86.25,69.9 87.35,69.9 88.45,69.9 69.201,70.943 84.05,71 85.15,71 86.25,71 87.35,71 88.45,71 84.05,72.1 85.15,72.1 86.25,72.1 87.35,72.1 88.45,72.1 84.05,73.2 85.15,73.2 86.25,73.2 87.35,73.2 88.45,73.2 71.201,73.443 84.05,74.3 85.15,74.3 86.25,74.3 87.35,74.3 88.45,74.3 75.925,74.575 94.425,77.075 67.425,80.075 66.425,83.075 71.2,83.425 72.3,83.425 71.2,84.525 72.3,84.525 95.888,87.907 84.932,90.443 84.925,90.575 88.799,91.182 84.892,91.292
"IMU CPOUT": C13.1 U3.20 | length 2.3
  Top Layer w0.3: C13.1 70.35,80.85 70.628,81.128 70.722,81.128 71,81.405 U3.20
"IMU INT": U2.42 U3.12 | length 36.3
  Top Layer w0.3: 70,86 67.105,86 65.5,84.395 65.5,78.676 65.676,78.5 73.566,78.5 75.42,80.354 v1@80.854,80.354 ; U2.42 86.525,75.525 86.525,75.972 86.927,76.374 86.927,76.923 v1@87.004,77
  L4 Signal w0.3: v1(80.779,80.429) 83.575,80.429 v1(86.929,77.075)
"IMU REGOUT": C11.1 U3.10 | length 2.1
  Top Layer w0.3: C11.1 71.35,87.05 71.5,86.9 71.5,86.545 U3.10
"IMU SCL": R4.1 U2.43 U3.23 | length 24.4
  Top Layer w0.3: U3.23 72.525,81.975 72.525,81.518 73.543,80.5 v1@74.5,80.5 ; v1@75.5,82.5 76,83 85.69,83 R4.1 86,80.69 86,80 86.25,79.75 86.25,76.441 86,76.191 U2.43
  L4 Signal w0.3: v1@74.5,80.5 75.5,81.5 v1@75.5,82.5
  other v1: 74.425,80.575 75.425,82.575
"IMU SDA": R5.1 U2.45 U3.24 | length 18.2
  Top Layer w0.3: U3.24@73.025,82 73.025,81.725 73.06,81.69 R5.1 83,79.176 83.515,78.66 84.735,78.66 85.25,78.145 85.25,76.855 85,76.605 U2.45
"MCU BOOT0": R1.2 U2.44 | length 6.6
  Top Layer w0.3: R1.2 85,79.5 85.75,78.75 85.75,76.648 85.5,76.398 U2.44
"MCU LED A": D1.1 U2.26 | length 4.1
  Top Layer w0.3: U2.26 91.975,69.85 93.025,68.8 D1.1
"MCU NRST": C9.1 J2.6 R2.1 U2.7 | length 76
  Top Layer w0.3: v1@80,66.5 79,67.5 79,71.5 79.35,71.85 U2.7 ; v1@90.033,90.033 90.033,90.583 91.45,92 C9.1 R2.1 95.577,92.113 95.577,93.923 v1@95.5,94 ; v1@90.5,81.5 91.754,81.5 94.399,84.145 94.399,85.379 94.77,85.749 J2.6
  L4 Signal w0.3: v1@80,66.5 80,92.5 81,93.5 94.892,93.5 95.392,94 v1@95.5,94 ; v1@90.033,90.033 90.033,81.901 v1@90.467,81.467
  other v1: 79.925,66.575 90.425,81.575 89.958,90.108 95.425,94.075
"MCU OSC IN": C1.1 U2.5 Y1.1 | length 15.5
  Top Layer w0.3: Y1.1 71.425,67.925 71.595,67.925 72.15,68.48 72.15,69.82 73.2,70.87 C1.1 76.205,72 77.065,72.86 79.828,72.86 79.838,72.85 U2.5
"MCU OSC OUT": R7.1 U2.6 | length 5.6
  Top Layer w0.3: R7.1 77.798,71.81 78.338,72.35 U2.6
"MCU PA4": J3.2 U2.14 | length 14.8
  Top Layer w0.3: J3.2 80.75,57.25 81.689,58.189 81.689,66.547 82.128,66.986 82.732,66.986 83.975,68.228 83.975,68.675 U2.14
"MCU PA5": J3.3 U2.15 | length 13.6
  Top Layer w0.3: J3.3 83.75,56.15 83.75,66.145 84.5,66.895 U2.15
"MCU PA6": J3.4 U2.16 | length 13.4
  Top Layer w0.3: U2.16 85,58 85.75,57.25 J3.4
"MCU PA7": J3.5 U2.17 | length 29.5
  Top Layer w0.3: J3.5 82.345,48.85 86.75,53.255 86.75,60.228 85.5,61.478 U2.17
"MCU SWCLK": J2.4 U2.37 | length 13.3
  Top Layer w0.3: U2.37 89,76.5 95.881,83.381 95.881,85.722 J2.4
"MCU SWDIO": J2.1 U2.34 | length 22.1
  Top Layer w0.3: U2.34@89.9,73.85 90.832,73.85 90.857,73.875 92.77,73.875 99.479,80.585 99.479,86.889 98.953,87.415 98.207,87.415 97.681,86.889 97.681,86.624 97.31,86.624 J2.1
"MCU SWO": J2.5 U2.39 | length 15.1
  Top Layer w0.3: U2.39 88,81.272 93.127,86.399 93.64,86.399 94.166,86.926 94.677,86.926 94.77,87.019 J2.5
"MCU VCAP 1": C8.1 U2.22 | length 3.8
  Top Layer w0.3: U2.22 88,65.35 C8.1
NetD1_2: D1.2 R3.2 | length 9.8
  Top Layer w0.3: R3.2 98.19,68.5 D1.2
NetD2_2: D2.2 R6.2 | length 4.4
  Top Layer w0.3: D2.2 109,52.05 R6.2
NetR3_1: R3.1
"USB D N": J1.2 U2.32 | length 20.7
  Top Layer w0.3: U2.32@89.9,72.85 99.262,72.85 100.262,73.85 110.19,73.85
"USB D P": J1.3 U2.33 | length 21.2
  Top Layer w0.3: U2.33@89.5,73.375 89.525,73.35 91.039,73.35 91.064,73.375 99.012,73.375 100.137,74.5 110.19,74.5
VBUS: C14.1 FB?.1 J1.1 | length 12.3
  Top Layer w0.3: FB?.1 C14.1 107,65.85 110,68.85 110,72.974 110.176,73.15 J1.1
VCC: J2.2
"XTAL IN": C2.1 R7.2 Y1.3 | length 27.6
  Top Layer w0.3: C2.1 68,66.65 67.124,65.774 67.124,65.376 67.5,65 74.5,65 75,65.5 75,68.924 74.824,69.1 Y1.3 73.325,69.1 73.75,69.525 73.75,70.25 74,70.5 75.824,70.5 76,70.324 76,64.366 76.176,64.19 R7.2
pads on no net: J1.4 J1.6 J1.7 J1.8 J1.9 J1.10 J1.11 J2. U2.2 U2.3 U2.4 U2.10 U2.11 U2.12 U2.13 U2.18 U2.19 U2.20 U2.21 U2.25 U2.27 U2.28 U2.29 U2.30 U2.31 U2.38 U2.40 U2.41 U2.46 U3.2 U3.3 U3.4 U3.5 U3.6 U3.7 U3.14 U3.15 U3.16 U3.17 U3.19 U3.21 U3.22
copper on no net: | length 0
  other v1: 3.125,3.275
  other v2: 67.925,48.075 112.425,48.075 112.425,93.075 67.925,93.575

## Polygon pours and split planes (outlines as drawn)
GND on L2 (GND) "GND_L02_P000" (solid, pour order 0): 65.77,47 65.5,93.5 67.5,95.5 68,95 114.73,95 114.73,47
GND on L3 GND) "GND_L03_P004" (solid, pour order 4): 65.77,47 65.5,93.5 67.5,95.5 68,95 114.73,95 114.73,47

## Silkscreen, mask and mechanical layers (free items; w line width, h text height)
Top Overlay:
  text "YWSM" at 107.754,86.254 h1.52
  text "SWD" at 94.254,81.254 h1.52
  text "USB" at 111.254,67.754 h1.52
  text "GPIO" at 79.754,58.254 h1.52
Top Assembly:
  lines w0.254: 64.5,47.27 ccw(c65.77,47.27) 65.77,46 68.5,46 113.5,46 114.73,46 ccw(c114.73,47.27) 116,47.27 116,94.73 ccw(c114.73,94.73) 114.73,96 65.77,96 ccw(c65.77,94.73) 64.5,94.73 64.5,47.27